# EAGLE board lora (EAGLE 6.5.0)
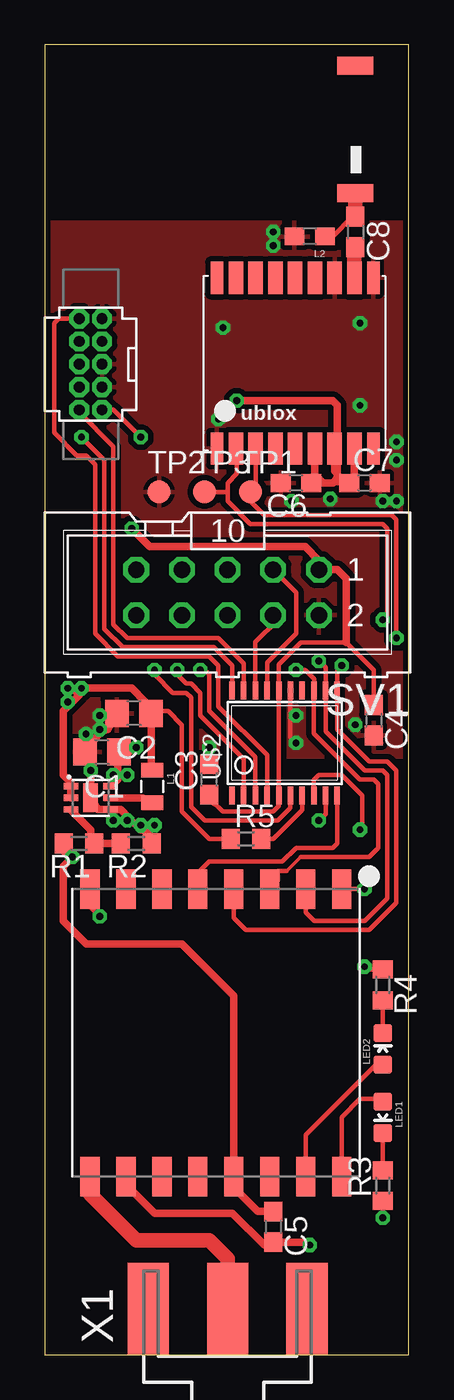
[diagram p0: board, top side]
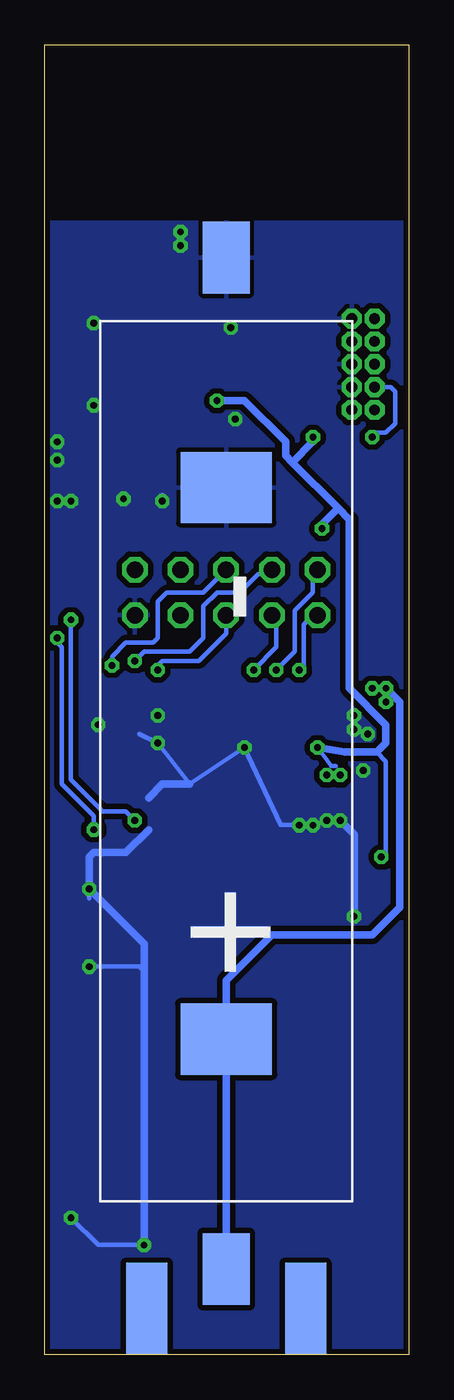
[diagram p1: board, bottom side, seen from below]

Size 20.24 x 72.89 mm. Coordinates in mm from the lower left corner, seen from the top.
Outline: 0,0 20.24,0 20.24,72.89 0,72.89 0,0
Copper layers (1*16): Top 0.035mm / dielectric 1.5mm / Bottom 0.035mm
Design rules "default *": minimum track width 8mil, minimum drill 15mil, track to track 8mil, track to pad 8mil, pad to pad 6mil, via to via 8mil, smd to smd 6mil, copper to edge 10mil, drill to drill 8mil, minimum pad ring 10mil, minimum via ring 8mil, stop-mask expansion 4mil, vias tented up to drill 15mil, thermal gap 10mil

## Footprints (pad centres in the part's own frame; a part is rotated, then mirrored left to right if it is on the bottom)
C0805 = smd 1.3 x 1.5: 1 -0.95,0; 2 0.95,0
C0603 = smd 1.1 x 1: 1 -0.85,0; 2 0.85,0
SWD_PTH_SHROUD = drill 0.6 octagon: 1 -2.54,-0.635; 2 -2.54,0.635; 3 -1.27,-0.635; 4 -1.27,0.635; 5 0,-0.635; 6 0,0.635; 7 1.27,-0.635; 8 1.27,0.635; 9 2.54,-0.635; 10 2.54,0.635
0805 = smd 0.8 x 1.2: 1 -0.9,0; 2 0.9,0
0603 = smd 1.1 x 1: 1 -0.85,0; 2 0.85,0
LED-0603 = smd 1 x 1: A 0,-0.877; C 0,0.877
R0603 = smd 1 x 1.1: 1 -0.85,0; 2 0.85,0
ML10 = drill 0.914 octagon: 1 -5.08,-1.27; 2 -5.08,1.27; 3 -2.54,-1.27; 4 -2.54,1.27; 5 0,-1.27; 6 0,1.27; 7 2.54,-1.27; 8 2.54,1.27; 9 5.08,-1.27; 10 5.08,1.27
B1,27 = smd 1.27 x 1.27: TP 0,0
KEYSTONE53 = smd 3.96 x 5.08: N1 14.73,0; P2 -15.97,0 | smd 4 x 2.6: N2 27.53,0; P1 -28.77,0
TSSOP20 = smd 0.305 x 0.991: 1 -2.925,-2.918; 2 -2.275,-2.918; 3 -1.625,-2.918; 4 -0.975,-2.918; 5 -0.325,-2.918; 6 0.325,-2.918; 7 0.975,-2.918; 8 1.625,-2.918; 9 2.275,-2.918; 10 2.925,-2.918; 11 2.925,2.918; 12 2.275,2.918; 13 1.625,2.918; 14 0.975,2.918; 15 0.325,2.918; 16 -0.325,2.918; 17 -0.975,2.918; 18 -1.625,2.918; 19 -2.275,2.918; 20 -2.925,2.918
UBLOX_MAX = smd 1.8 x 0.7: 1_GND 4.95,-4.4; 9_V_RESET 4.95,4.3; 10_GND -4.55,4.3; 18_RESERVED -4.55,-4.4 | smd 1.8 x 0.8: 2_TXD1 4.95,-3.35; 3_RXD1 4.95,-2.25; 4_TIMEPULSE 4.95,-1.15; 5_EXTINT0 4.95,-0.05; 6_V_BCKP 4.95,1.05; 7_VCC_IO 4.95,2.15; 8_VCC 4.95,3.25; 11_RF_IN -4.55,3.25; 12_GND -4.55,2.15; 13_ANTON -4.55,1.05; 14_VCC_RF -4.55,-0.05; 15_RESERVED -4.55,-1.15; 16_SDA2 -4.55,-2.25; 17_SCL2 -4.55,-3.35
JTI_ANTENNA-1575AT43A40 = smd 1 x 2: FEED -3.175,0; NC 3.925,0
RFM97 = smd 2.184 x 1.067: 1 0,0; 2 0,-2; 3 0,-4; 4 0,-6; 5 0,-8; 6 0,-10; 7 0,-12; 8 0,-14; 9 16,-14; 10 16,-12; 11 16,-10; 12 16,-8; 13 16,-6; 14 16,-4; 15 16,-2; 16 16,0
LFCSP6 = smd 0.35 x 0.8: 1 -0.65,-1.1; 2 0,-1.1; 3 0.65,-1.1; 4 0.65,1.1; 5 0,1.1; 6 -0.65,1.1 | smd 1.6 x 0.8: EP 0,0
J502-ND-142-0701-801/806 = smd 5.08 x 2.286: 1 2.565,0; G@1 2.565,4.42; G@2 2.565,-4.42 | smd 5.08 x 2.286 bottom: G@3 2.565,4.42; G@4 2.565,-4.42

## Placement (x,y rotation side)
C1  [C0805]  3.17,33.53 180 top
C2  [C0805]  4.95,35.69 180 top
C3  [C0603]  9.14,32 90 top
C4  [C0603]  18.29,35.31 270 top
C5  [C0603]  12.7,7.11 270 top
C6  [C0603]  13.97,48.51 180 top
C7  [C0603]  17.78,48.51 0 top
C8  [C0603]  17.27,62.48 270 top
J1  SWD_PTH_SHROUD  [SWD_PTH_SHROUD]  2.54,55.12 90 top
L1  [0805]  5.97,31.62 270 top
L2  [0603]  14.73,62.23 180 top
LED1  [LED-0603]  18.8,13.21 180 top
LED2  [LED-0603]  18.8,17.02 0 top
R1  [R0603]  1.91,28.45 180 top
R2  [R0603]  5.08,28.45 180 top
R3  [R0603]  18.8,9.4 90 top
R4  [R0603]  18.8,20.57 270 top
R5  [R0603]  11.18,28.7 0 top
SV1  [ML10]  10.16,42.42 180 top
TP1  PTR1B1,27  [B1,27]  11.43,48.01 0 top
TP2  PTR1B1,27  [B1,27]  6.35,48.01 0 top
TP3  PTR1B1,27  [B1,27]  8.89,48.01 0 top
U$1  KEYSTONE-53  [KEYSTONE53]  10.16,33.53 90 bottom
U$2  STM32F030F4  [TSSOP20]  13.34,34.04 0 top
U$3  UBLOX_MAX  [UBLOX_MAX]  13.97,55.37 270 top
U$4  JTI_ANTENNA-1575AT43A40  [JTI_ANTENNA-1575AT43A40]  17.27,67.82 90 top
U$6  RFM98  [RFM97]  16.51,25.91 270 top
U$7  ADP1607  [LFCSP6]  2.54,30.99 270 top
X1  SMA-142-0701-801/806  [J502-ND-142-0701-801/806]  10.16,0 90 top

## Library data of the parts
C1-C8 R1-R5 = rcl
J1 U$2 = dtb
L1 L2 = SparkFun-Passives
LED1 LED2 = SparkFun-LED
SV1 = con-ml; OC_FARNELL: unknown; OC_NEWARK: unknown
TP1-TP3 = testpad
U$1 U$6 U$7 = Mine
U$3 U$4 = Ava
X1 = con-coax; MF: JOHNSON COMPONENTS; MPN: 142-0701-801; OC_FARNELL: 1608592; OC_NEWARK: 90F2624

## Nets
9_V_RESET: U$3.9_V_RESET
+3V3: C1.1 C3.1 C4.1 C5.1 C6.1 C7.1 J1.1 R1.2 SV1.1 U$2.5 U$2.16 U$3.6_V_BCKP U$3.7_VCC_IO U$3.8_VCC U$6.13 U$7.6
GND: C1.2 C2.2 C3.2 C4.2 C5.2 C6.2 C7.2 J1.3 J1.5 J1.9 L2.2 R2.1 R3.1 R4.1 SV1.2 TP2.TP U$1.N1 U$1.N2 U$2.15 U$3.1_GND U$3.10_GND U$3.12_GND U$6.1 U$6.8 U$6.10 U$7.4 U$7.EP
GPIO1: SV1.8 U$2.3
GPIO2: SV1.9 U$2.2
GPIO3: SV1.10 U$2.6
MISO: SV1.7 U$2.12 U$6.2
MOSI: SV1.6 U$2.13 U$6.3
N$1: C8.2 U$3.11_RF_IN
N$2: U$6.9 X1.1
N$3: L1.2 U$7.5
N$4: C8.1 L2.1 U$4.FEED
N$5: LED1.C R3.2
N$6: R1.1 R2.2 U$7.3
N$7: LED2.C R4.2
N$8: LED2.A U$6.15
N$9: R5.2 U$2.7
N$12: LED1.A U$6.16
NSS: U$2.10 U$6.5
RST: J1.10 U$2.4
SCL: SV1.3 U$2.17
SCLK: SV1.5 U$2.11 U$6.4
SDA: SV1.4 U$2.18
SWCLK: J1.4 U$2.20
SWDAT: J1.2 U$2.19
UART_RX: TP3.TP U$2.9 U$3.2_TXD1
UART_TX: TP1.TP U$2.8 U$3.3_RXD1
VBAT: C2.1 L1.1 R5.1 U$1.P1 U$1.P2 U$7.1 U$7.2

## Tracks (layer width: path | path; a pad name or v marks a point on that pad's centre or on a via)
+3V3  (via drill 0.38)
  Top 0.254: C6.1 15.49,48.51 | 16,48.51 C7.1 | 16.93,51.15 U$3.8_VCC | v5.33,51.05 3.81,52.58 J1.1 | C1.1 4.12,32.96 v5.08,33.78 | 4.06,32.26 v3.81,32.26 v4.57,32.26 | R1.2 1.05,27.9 v1.52,27.69 | 18.71,35.65 C4.1 18.29,38.1 16.76,39.62 14.22,39.62 13.01,38.41 U$2.16 U$2.5 13.01,30.54 12.7,30.23 9.91,30.23 9.65,30.48 9.4,30.65 C3.1
  Top 0.406: U$7.6 3.7,31.64 4.06,32 4.06,32.26 4.06,33.47 C1.1 | v10.67,53.09 16,53.09 16.26,52.83 16.26,49.02 | v4.83,45.97 5.84,44.96 14.48,44.96 15.24,44.2 SV1.1 16.26,43.69 16.76,43.18 16.76,39.62 | C5.1 11.85,7.96 10.67,9.14 10.67,9.75 U$6.13 10.51,19.97 7.62,22.86 2.29,22.86 1.02,24.13 1.02,27.18 v1.52,27.69 | 16.26,49.02 16.26,48.77 16,48.51 15.49,48.51 15.02,48.99 U$3.6_V_BCKP | U$3.8_VCC 17.22,48.8 C7.1 | U$3.7_VCC_IO 16.12,49.16 16.26,49.02
  Bottom 0.254: 1.78,33.53 1.27,33.02 1.27,27.94 v1.52,27.69 | 4.06,32.77 4.32,32.77 v5.08,33.78
  Bottom 0.406: 3.94,47.12 3.3,46.48 3.3,37.08 1.27,35.05 1.27,34.04 1.78,33.53 3.56,33.53 v5.08,33.78 | 3.94,47.12 6.48,49.66 | v5.33,51.05 5.33,50.8 6.48,49.66 | v4.83,45.97 4.83,46.23 3.94,47.12 | v10.67,53.09 9.14,53.09 6.86,50.8 6.86,50.04 6.48,49.66
GND  (via drill 0.38)
  Top 0.254: C4.2 18.71,34.04 18.29,34.04 | U$6.1 v17.78,25.91 | C3.2 v9.14,33.78 | v3.05,35.56 v3.05,34.8 | v2.29,34.54 v3.05,34.8 | v3.05,34.8 2.79,34.8 | v3.05,34.8 3.14,34.7 | U$6.8 2.51,24.92 v3.05,24.38 | U$2.15 13.66,34.35 v13.97,34.04 | R3.1 v18.8,7.62 | R4.1 17.95,21.42 v17.78,21.59
  Top 0.406: C2.2 3.5,34.8 3.14,34.7 C1.2 2.54,33.21 v2.54,32.51 U$7.EP 2.94,30.34 U$7.4 | U$7.4 4.21,30.34 4.7,29.84 | 4.7,29.84 5.21,29.34 | 5.21,29.34 5.33,29.21 5.59,29.21 5.71,29.08 | 5.71,29.08 5.84,28.96 5.84,28.54 R2.1 | v3.81,29.72 3.81,30.17 U$7.4 | v4.57,29.72 4.7,29.84 | v5.33,29.46 5.21,29.34 | v6.1,29.46 5.71,29.08 | 9.06,32.51 C3.2 | v14.73,6.1 14.39,6.26 C5.2 12.19,6.1 10.41,7.87 6.1,7.87 4.57,9.4 4.57,9.85 U$6.10 | C6.2 13.12,48.68
  Bottom 0.254: v17.78,25.91 17.78,25.4 | 14.99,34.54 v13.97,34.04 12.19,31.75 v9.14,33.78 7.11,29.46 v6.1,29.46 | 18.54,7.62 v18.8,7.62 17.27,6.1 v14.73,6.1 | v17.78,21.59 14.99,21.59 14.73,21.34
  Bottom 0.406: v14.73,6.1 14.73,21.34 14.73,22.86 v17.78,25.91 17.78,27.69 17.53,27.94 15.75,27.94 14.48,29.21 | 12.19,31.75 13.72,31.75 14.48,30.99 | U$1.N2 10.16,59.69 | v13.72,47.5 13.72,47.75 | v3.05,24.38 3.05,28.96 v3.81,29.72
  other vias: 17.27,35.05 13.97,35.56 9.91,57.15 17.53,57.4 17.53,52.83 9.65,52.07 12.7,61.72 12.7,62.48 19.56,47.5 19.56,49.78 19.56,50.8 18.8,47.5 15.88,47.62
  pour Bottom (isolate 0.305): 0,62.99 21.84,62.99 21.84,0.25 -2.03,0.25 -2.03,12.45
  pour Top (isolate 0.305): -0.51,62.99 22.1,62.99 22.1,33.27 -0.76,33.27 -0.76,54.86
GPIO1  (via drill 0.38)
  Top 0.254: U$2.3 11.71,33.25 9.14,35.81 9.14,37.85 8.89,38.1 v8.64,38.1
  Bottom 0.254: v8.64,38.1 7.37,39.37 7.37,40.89 SV1.8
GPIO2  (via drill 0.38)
  Top 0.254: U$2.2 11.06,33.14 8.64,35.56 8.64,36.83 8.13,37.34 7.87,37.34 7.37,37.85 v7.37,38.1
  Bottom 0.254: v7.37,38.1 6.35,39.12 6.35,41.4 5.33,42.42 5.33,43.43 SV1.9
GPIO3  (via drill 0.38)
  Top 0.254: v6.1,38.1 6.1,37.85 7.11,36.83 7.87,36.83 8.13,36.58 8.13,30.48 8.89,29.72 12.95,29.72 13.66,30.42 U$2.6
  Bottom 0.254: 6.1,38.35 v6.1,38.1 5.84,38.35 5.84,40.64 5.33,41.15 SV1.10
MISO  (via drill 0.38)
  Top 0.254: v15.24,38.61 15.61,38.24 U$2.12 15.61,34.68 17.78,32.51 18.8,32.51 19.05,32.26 19.05,25.4 17.78,24.13 14.99,24.13 14.51,24.61 U$6.2
  Bottom 0.254: SV1.7 7.87,43.43 8.38,43.43 9.4,42.42 10.67,42.42 11.43,41.66 11.43,39.88 12.19,39.12 14.73,39.12 v15.24,38.61
MOSI  (via drill 0.38)
  Top 0.203: 14.22,27.69 13.46,26.92
  Top 0.254: U$2.13 14.96,34.57 17.53,32 18.29,32 18.54,31.75 18.54,28.19 18.03,27.69 14.22,27.69 | 13.46,26.92 12.95,26.92 12.95,26.35 U$6.3 12.26,25.65 | U$2.13 14.96,37.36 | v13.97,38.1 14.48,38.1 14.99,37.59 14.99,36.98 U$2.13
  Bottom 0.254: v13.97,38.1 13.97,38.35 13.72,38.61 11.68,38.61 10.16,40.13 SV1.6
N$1
  Top 0.813: U$3.11_RF_IN 17.22,61.58 C8.2
N$2
  Top 0.813: U$6.9 2.51,8.92 5.08,6.35 9.14,6.35 10.16,5.33 X1.1
N$3
  Top 0.406: U$7.5 5.45,30.99 L1.2
N$4
  Top 0.254: C8.1 17.11,63.33 16,62.23 L2.1
  Top 0.813: U$4.FEED C8.1
N$5
  Top 0.254: LED1.C R3.2
N$6
  Top 0.406: R2.2 R1.1 2.54,28.66 2.54,29.21 1.44,30.31 U$7.3
N$7
  Top 0.254: LED2.C R4.2
N$8
  Top 0.254: U$6.15 14.51,12.22 18.43,16.14 LED2.A
N$9
  Top 0.254: R5.2 12.7,28.7 14.31,30.31 U$2.7
N$12
  Top 0.254: U$6.16 16.51,13.21 17.53,14.22 18.66,14.22 LED1.A
NSS
  Top 0.254: U$6.5 8.51,26.8 9.14,27.43 13.21,27.43 13.97,28.19 16,28.19 16.26,28.45 16.26,29.34 U$2.10
RST
  Top 0.254: U$2.4 12.36,33.36 9.65,36.07 9.65,38.35 9.14,38.86 4.06,38.86 2.79,40.13 2.79,49.53 2.29,50.04 1.78,50.04 0.51,51.31 0.51,57.4 0.76,57.66 J1.10
SCL
  Top 0.254: U$2.17 12.36,38.52 13.97,40.13 13.97,42.42 SV1.3
SCLK  (via drill 0.38)
  Top 0.254: v16.51,38.35 16.26,38.1 U$2.11 16.26,34.79 18.03,33.02 19.05,33.02 19.56,32.51 19.56,25.15 18.03,23.62 11.18,23.62 10.51,24.29 U$6.4
  Bottom 0.254: SV1.5 11.43,42.42 13.46,42.42 13.97,41.91 13.97,39.88 14.22,39.62 15.75,39.62 16.51,38.86 v16.51,38.35
SDA
  Top 0.254: U$2.18 11.71,39.65 12.95,40.89 SV1.4
SWCLK  (via drill 0.38)
  Top 0.254: U$2.20 10.41,38.36 9.4,39.37 4.32,39.37 3.3,40.39 3.3,49.78 v2.03,51.05
  Bottom 0.254: J1.4 1.02,53.85 0.76,53.59 0.76,51.82 1.27,51.31 1.78,51.31 v2.03,51.05
SWDAT
  Top 0.254: U$2.19 11.06,38.47 9.65,39.88 4.57,39.88 3.81,40.64 3.81,50.55 1.91,52.45 J1.2
UART_RX  (via drill 0.38)
  Top 0.254: v18.8,40.89 19.05,41.15 19.05,45.97 18.8,46.23 11.43,46.23 10.16,47.5 10.16,48.01 | U$2.9 15.61,30.09 v15.24,29.72 | 10.16,48.01 10.16,48.51 10.67,49.02 10.67,50.37 U$3.2_TXD1 | TP3.TP 10.16,48.01
  Bottom 0.254: v18.8,40.89 18.8,32 17.02,30.23 15.75,30.23 v15.24,29.72
UART_TX  (via drill 0.38)
  Top 0.254: v19.56,39.88 19.56,46.48 19.3,46.74 12.19,46.74 11.43,47.5 TP1.TP 11.72,48.3 U$3.3_RXD1 | v17.53,29.21 17.65,29.34 17.65,31.11 16.51,32.26 15.24,32.26 14.96,31.98 U$2.8
  Bottom 0.254: v19.56,39.88 19.56,39.62 19.3,39.37 19.3,31.75 17.53,29.97 v17.53,29.21
VBAT  (via drill 0.38)
  Top 0.254: R5.1 9.14,28.7 7.62,30.23 7.62,35.05 6.86,35.81 6.03,35.81 C2.1
  Top 0.406: L1.1 5.9,32.84 C2.1 5.59,35.24 5.59,36.32 4.83,37.08 v2.03,37.08 1.78,37.08 1.91,36.7 | U$7.2 U$7.1 1.44,31.83 1.02,32.26 1.02,35.81 1.4,36.2 | 1.4,36.2 1.91,36.7 | v1.27,37.08 1.52,37.08 1.91,36.7 | v1.27,36.32 1.4,36.2
  Bottom 0.406: v1.27,37.08 0.51,36.32 0.51,24.89 2.03,23.37 7.62,23.37 10.16,20.83 U$1.P2 U$1.P1